# EAGLE board Platine v25 (EAGLE 9.7.0)
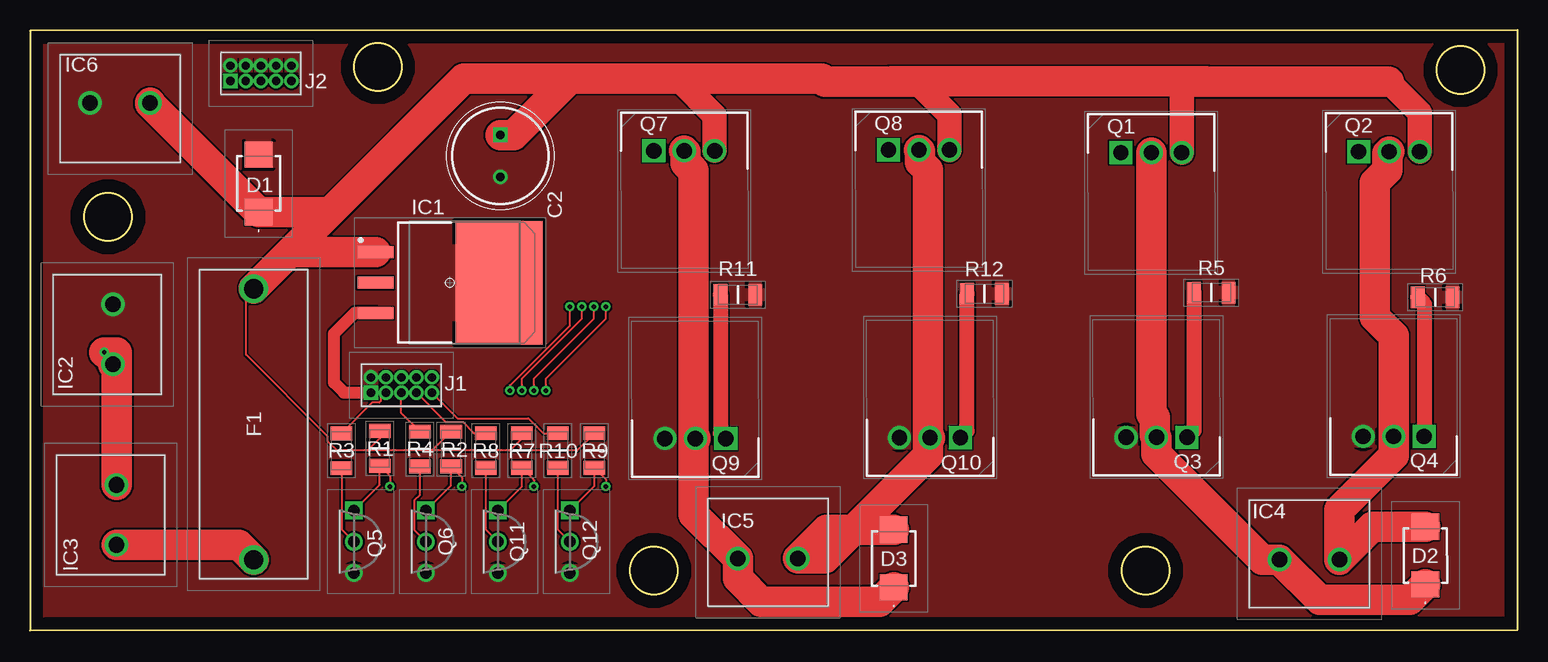
[diagram p0: board, top side]
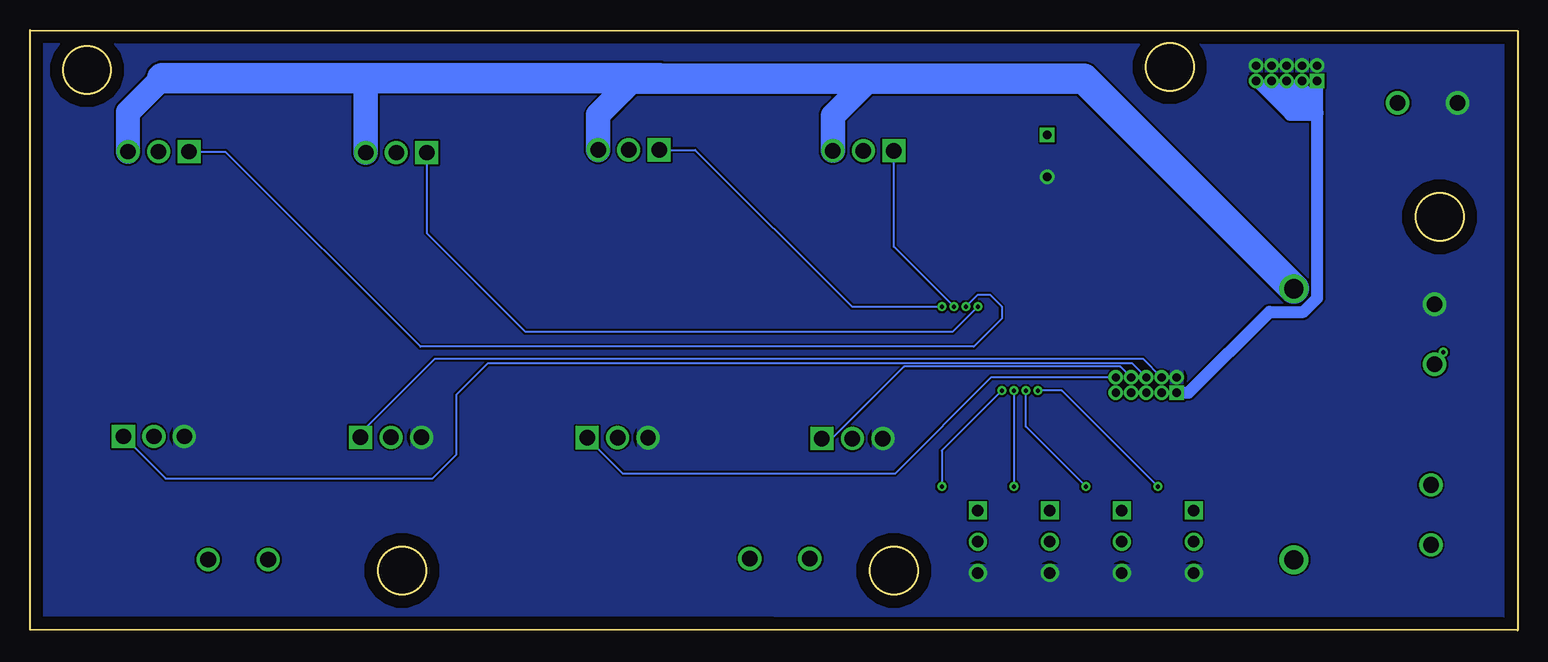
[diagram p1: board, bottom side, seen from below]

Size 124.01 x 50.08 mm. Coordinates in mm from the lower left corner, seen from the top.
Outline: 0,0 124.01,0.08 124.01,50.08 0,50 0,0
Outline: circle at 119.26,46.75 radius 2
Outline: circle at 29,47 radius 2
Outline: circle at 6.5,34.5 radius 2
Outline: circle at 52,5 radius 2
Outline: circle at 93,5 radius 2
Copper layers (1*16): Top / Bottom
Stack-up Default Layer Stack: Top User Defined 0.035mm / Dielectric-1 User Defined 1.5mm / Bottom User Defined 0.035mm
Design rules "default": minimum track width 6mil, minimum drill 0.35mm, track to track 6mil, track to pad 6mil, pad to pad 6mil, via to via 6mil, smd to smd 6mil, copper to edge 40mil, drill to drill 6mil, minimum pad ring 10mil, minimum via ring 8mil, stop-mask expansion 4mil, vias tented up to drill 0mil, thermal gap 10mil
Net classes: 1 Leistung: width 2.032 mm; 2 Steuerung: width 0.152 mm

## Footprints (pad centres in the part's own frame; a part is rotated, then mirrored left to right if it is on the bottom)
CAPPRD350W52D800H1300 = drill 0.7 pad 1.1 square: 1 0,0 | drill 0.7 pad 1.1: 2 3.5,0
10BJ15CA = smd 2.2 x 2.3: 1 -2.4,0; 2 2.4,0
64600001223 = drill 1.6 pad 2.4: 1 0,0; 2 22.6,0
TO254P1420X457-4N = smd 3 x 1: 1 -6.2,2.54; 2 -6.2,0; 3 -6.2,-2.54 | smd 7.25 x 10.3: 4 4.1,0
TB00150002BE = drill 1.3 pad 1.95: 1 0,0; 2 5,0
M503500542 = drill 0.7 pad 1.1 square: 1 0,0 | drill 0.7 pad 1.1: 2 0,1.27; 3 1.27,0; 4 1.27,1.27; 5 2.54,0; 6 2.54,1.27; 7 3.81,0; 8 3.81,1.27; 9 5.08,0; 10 5.08,1.27
TO254P469X1042X1967-3P = drill 1.28 pad 1.92 square: 1 0,0 | drill 1.28 pad 1.92: 2 2.54,0; 3 5.08,0
KA431AZTA = drill 0.96 pad 1.493 square: 1 0,0 | drill 0.96 pad 1.493: 2 2.6,0; 3 5.2,0
RESC3216X74N = smd 1.15 x 1.8: 1 -1.45,0; 2 1.45,0

## Placement (x,y rotation side)
C2  860020474014  [CAPPRD350W52D800H1300]  39.21,41.32 270 top
D1  10BJ15CA  [10BJ15CA]  19.06,37.28 90 top
D2  10BJ15CA  [10BJ15CA]  116.32,6.25 90 top
D3  10BJ15CA  [10BJ15CA]  72,6 90 top
F1  64600001223  [64600001223]  18.65,5.9 90 top
IC1  MC7805ACD2TR4G  [TO254P1420X457-4N]  35,29 0 top
IC2  TB001-500-02BE  [TB00150002BE]  6.92,22.2 90 top
IC3  TB001-500-02BE  [TB00150002BE]  7.22,7.14 90 top
IC4  TB001-500-02BE  [TB00150002BE]  104.16,5.91 0 top
IC5  TB001-500-02BE  [TB00150002BE]  59,6 0 top
IC6  TB001-500-02BE  [TB00150002BE]  10,44 180 top
J1  M50-3500542  [M503500542]  28.41,19.83 0 top
J2  M50-3500542  [M503500542]  16.71,45.83 0 top
Q1  IRF5210PBF  [TO254P469X1042X1967-3P]  90.93,39.85 0 top
Q2  IRF5210PBF  [TO254P469X1042X1967-3P]  110.76,39.93 0 top
Q3  IRLZ44NPBF  [TO254P469X1042X1967-3P]  96.45,16.11 180 top
Q4  IRLZ44NPBF  [TO254P469X1042X1967-3P]  116.22,16.19 180 top
Q5  BC550CTA  [KA431AZTA]  27,10 270 top
Q6  BC550CTA  [KA431AZTA]  33,10 270 top
Q7  IRF5210PBF  [TO254P469X1042X1967-3P]  52,40 0 top
Q8  IRF5210PBF  [TO254P469X1042X1967-3P]  71.56,40.08 0 top
Q9  IRLZ44NPBF  [TO254P469X1042X1967-3P]  58,16 180 top
Q10  IRLZ44NPBF  [TO254P469X1042X1967-3P]  77.56,16.08 180 top
Q11  BC550CTA  [KA431AZTA]  39,10 270 top
Q12  BC550CTA  [KA431AZTA]  45,10 270 top
R1  CRMA1206AF10K0DKEF  [RESC3216X74N]  29.15,15.18 270 top
R2  CRMA1206AF10K0DKEF  [RESC3216X74N]  35.1,15.13 270 top
R3  CRMA1206AF10K0DKEF  [RESC3216X74N]  25.96,14.99 270 top
R4  CRMA1206AF10K0DKEF  [RESC3216X74N]  32.5,15.13 270 top
R5  CRMA1206AF10K0DKEF  [RESC3216X74N]  98.47,28.17 0 top
R6  CRMA1206AF10K0DKEF  [RESC3216X74N]  117.13,27.79 0 top
R7  CRMA1206AF10K0DKEF  [RESC3216X74N]  41,15 270 top
R8  CRMA1206AF10K0DKEF  [RESC3216X74N]  38,15 270 top
R9  CRMA1206AF10K0DKEF  [RESC3216X74N]  47.05,15 270 top
R10  CRMA1206AF10K0DKEF  [RESC3216X74N]  44,15 270 top
R11  CRMA1206AF10K0DKEF  [RESC3216X74N]  59,28 0 top
R12  CRMA1206AF10K0DKEF  [RESC3216X74N]  79.56,28.08 0 top

## Library data of the parts
C2 = SamacSys_Parts; DESCRIPTION: Wurth Elektronik 470uF 25 V dc Aluminium Electrolytic Capacitor, WCAP-ATG5 Series 2000h 8 (Dia.) x 11.5mm; HEIGHT: 13mm; MANUFACTURER_NAME: Wurth Elektronik; MANUFACTURER_PART_NUMBER: 860020474014; MOUSER_PART_NUMBER: 710-860020474014; MOUSER_PRICE-STOCK: https://www.mouser.co.uk/ProductDetail/Wurth-Elektronik/860020474014?qs=0KOYDY2FL2%252BfCDf5E%252Bq6Tw%3D%3D
D1-D3 = SamacSys_Parts; DESCRIPTION: 24.4V Clamp 41A Ipp Tvs Diode Surface Mount SMB; HEIGHT: 2.4mm; MANUFACTURER_NAME: Eaton; MANUFACTURER_PART_NUMBER: 10BJ15CA
F1 = SamacSys_Parts; DESCRIPTION: LITTELFUSE - 64600001223 - FUSE BLOCK, 5X20MM, THROUGH HOLE; HEIGHT: 12mm; MANUFACTURER_NAME: LITTELFUSE; MANUFACTURER_PART_NUMBER: 64600001223; MOUSER_PART_NUMBER: 576-64600001223; MOUSER_PRICE-STOCK: https://www.mouser.co.uk/ProductDetail/Littelfuse/64600001223?qs=up76HT6PtJjfTS5uVso6wg%3D%3D
IC1 = Custom Libary; HEIGHT: 4.572mm; MANUFACTURER_NAME: onsemi; MANUFACTURER_PART_NUMBER: MC7805ACD2TR4G; MOUSER_PART_NUMBER: 863-MC7805ACD2TR4G; MOUSER_PRICE-STOCK: https://www.mouser.co.uk/ProductDetail/onsemi/MC7805ACD2TR4G?qs=%252B9%2Fcbd0IE0T86FFku%252BN0%2FA%3D%3D
IC2-IC6 = SamacSys_Parts; DESCRIPTION: Fixed Terminal Blocks screw type, 5.00, horizontal, 2 poles, CUI Blue, slotted screw, PCB mount; HEIGHT: 12.9mm; MANUFACTURER_NAME: CUI Inc.; MANUFACTURER_PART_NUMBER: TB001-500-02BE; MOUSER_PART_NUMBER: 490-TB001-500-02BE; MOUSER_PRICE-STOCK: https://www.mouser.co.uk/ProductDetail/CUI-Devices/TB001-500-02BE?qs=vLWxofP3U2zBBnHgU5u3DA%3D%3D
J1 J2 = SamacSys_Parts; DESCRIPTION: Header 2x5way DIL VERT Pin HARWIN M50-35 Series, 1.27mm Pitch 10 Way 2 Row Straight PCB Header, Solder Termination, 1A; HEIGHT: 4.15mm; MANUFACTURER_NAME: Harwin; MANUFACTURER_PART_NUMBER: M50-3500542; MOUSER_PART_NUMBER: 855-M50-3500542; MOUSER_PRICE-STOCK: https://www.mouser.co.uk/ProductDetail/Harwin/M50-3500542?qs=9fQaSFfsqsyXI0P9tFOVoQ%3D%3D
Q1 Q2 Q7 Q8 = Custom Libary; DESCRIPTION: MOSFET P-Channel 100V 40A TO220AB Infineon IRF5210PBF P-channel MOSFET Transistor, 40 A, 100 V, 3-Pin TO-220AB; HEIGHT: 4.69mm; MANUFACTURER_NAME: Infineon; MANUFACTURER_PART_NUMBER: IRF5210PBF; MOUSER_PART_NUMBER: 942-IRF5210PBF; MOUSER_PRICE-STOCK: https://www.mouser.co.uk/ProductDetail/Infineon-IR/IRF5210PBF?qs=9%252BKlkBgLFf3S3YiL4ijtLg%3D%3D
Q3 Q4 Q9 Q10 = Custom Libary; DESCRIPTION: N-channel MOSFET,IRLZ44N 47A 55V; HEIGHT: 4.69mm; MANUFACTURER_NAME: Infineon; MANUFACTURER_PART_NUMBER: IRLZ44NPBF; MOUSER_PART_NUMBER: 942-IRLZ44NPBF; MOUSER_PRICE-STOCK: https://www.mouser.co.uk/ProductDetail/Infineon-IR/IRLZ44NPBF?qs=9%252BKlkBgLFf15OZZk%252BD0ibg%3D%3D
Q5 Q6 Q11 Q12 = SamacSys_Parts; DESCRIPTION: Bipolar Transistors - BJT NPN 45V 100mA HFE/800; HEIGHT: 5.33mm; MANUFACTURER_NAME: onsemi; MANUFACTURER_PART_NUMBER: BC550CTA; MOUSER_PART_NUMBER: 512-BC550CTA; MOUSER_PRICE-STOCK: https://www.mouser.co.uk/ProductDetail/ON-Semiconductor-Fairchild/BC550CTA/?qs=ljbEvF4DwOM46%2Fg9NzWlqQ%3D%3D
R1-R12 = SamacSys_Parts; DESCRIPTION: Thick Film Resistors - SMD 0.30W 10Kohm .5% AEC-Q200; HEIGHT: 0.74mm; MANUFACTURER_NAME: Vishay; MANUFACTURER_PART_NUMBER: CRMA1206AF10K0DKEF; MOUSER_PART_NUMBER: 71-CRMA1206AF10K0DKF; MOUSER_PRICE-STOCK: https://www.mouser.co.uk/ProductDetail/Vishay/CRMA1206AF10K0DKEF?qs=QNEnbhJQKvbmEa6uzWLn8A%3D%3D

## Nets
D1 [Steuerung]: J1.3 R3.1
D2 [Steuerung]: J1.5 R4.1
D3 [Steuerung]: J1.4 Q3.1 R5.1
D4 [Steuerung]: J1.6 Q4.1 R6.1
D5 [Steuerung]: J1.7 R8.1
D6 [Steuerung]: J1.9 R10.1
D7 [Steuerung]: J1.8 Q9.1 R11.1
D8 [Steuerung]: J1.10 Q10.1 R12.1
GND: C2.2 D1.2 IC1.4 IC2.2 IC6.2 J1.2 J2.2 J2.4 J2.6 J2.8 J2.10 Q3.3 Q4.3 Q5.3 Q6.3 Q9.3 Q10.3 Q11.3 Q12.3 R5.2 R6.2 R11.2 R12.2
GND_NOPAD: IC1.2
N$1: F1.1 IC3.1
N$2: Q1.1 Q5.1 R1.2
N$3 [Steuerung]: Q5.2 R3.2
N$4: Q2.1 Q6.1 R2.2
N$5 [Steuerung]: Q6.2 R4.2
N$6: D2.2 IC4.2 Q2.2 Q4.2
N$7: D2.1 IC4.1 Q1.2 Q3.2
N$8: Q7.1 Q11.1 R7.2
N$9 [Steuerung]: Q11.2 R8.2
N$10: Q8.1 Q12.1 R9.2
N$11 [Steuerung]: Q12.2 R10.2
N$12: D3.2 IC5.2 Q8.2 Q10.2
N$13: D3.1 IC5.1 Q7.2 Q9.2
VIN [Leistung]: IC2.1 IC3.2
VIN_S: C2.1 D1.1 F1.2 IC1.1 IC6.1 Q1.3 Q2.3 Q7.3 Q8.3 R1.1 R2.1 R7.1 R9.1
VS5 [Steuerung]: IC1.3 J1.1 J2.1 J2.3 J2.5 J2.7 J2.9

## Tracks (layer width: path | path; a pad name or v marks a point on that pad's centre or on a via)
D1
  Top 0.152: R3.1 28.52,19 29.11,19 29.24,19.13 29.24,19.39 J1.3
D2
  Top 0.152: R4.1 30.95,18.13 J1.5
D3
  Top 1.27: R5.1 97.03,16.68 Q3.1
  Bottom 0.152: J1.4 31.25,22.67 90.25,22.67 96.45,16.46 Q3.1
D4
  Top 1.27: R6.1 116.26,27.21 116.26,16.23 Q4.1
  Bottom 0.152: Q4.1 112.7,12.67 90.47,12.67 88.47,14.67 88.47,19.67 85.83,22.3 32.16,22.3 J1.6
D5
  Top 0.152: J1.7 34.67,17.38 36.1,17.38 37.03,16.45 R8.1
D6
  Top 0.152: J1.9 35.63,17.69 41.56,17.69 42.8,16.45 R10.1
D7
  Top 1.27: R11.1 57.55,16.45 Q9.1
  Bottom 0.152: J1.8 33.12,22 51.14,22 57.14,16 Q9.1
D8
  Top 1.27: R12.1 78.11,16.63 Q10.1
  Bottom 0.152: J1.10 43.9,21.1 51.92,13.08 74.56,13.08 Q10.1
GND
  pour Top: 0,49.89 0,0.08 123.01,0.08 123.01,51.14
  pour Bottom: 0,49.89 0,0.08 124.84,0.08 124.84,51.16
N$1
  Top 2.54: IC3.1 17.41,7.14 F1.1
N$2  (via drill 0.35)
  Top 0.152: Q5.1 29.15,12.15 R1.2 30,12.88 v30,12 | v40,20 40,20.43 45,25.43 v45,27
  Bottom 0.152: v30,12 38,20 v40,20 | v45,27 47.08,24.92 82.72,24.92 90.94,33.14 Q1.1
N$3
  Top 0.152: R3.2 26.02,13.47 26.02,8.38 Q5.2
N$4  (via drill 0.35)
  Top 0.152: Q6.1 35.1,12.1 R2.2 36,12.78 v36,12 | v41,20 41,21 46,26 v46,27
  Bottom 0.152: v36,12 41,17 v41,20 | v46,27 45,28 44,28 43,27 43,26 45.33,23.67 91.47,23.67 107.72,39.93 Q2.1
N$5
  Top 0.152: R4.2 32.5,11.32 32.02,10.84 32.02,8.38 Q6.2
N$6
  Top 2.54: D2.2 111.9,8.65 IC4.2 109.16,10.07 113.68,14.6 Q4.2 113.68,24.55 112.09,26.14 112.09,37.33 113.14,38.38 113.14,39.77 Q2.2
N$7
  Top 2.54: Q1.2 93.47,18.07 93.76,17.78 93.76,16.27 Q3.2 93.92,14.72 102.73,5.91 IC4.1 107.51,2.55 115.02,2.55 D2.1
N$8  (via drill 0.35)
  Top 0.152: Q11.1 41,12 R7.2 42,12.55 v42,12 | v42,20 42,21 47,26 v47,27
  Bottom 0.152: v42,20 v42,12 | v47,27 52,32 Q7.1
N$9
  Top 0.152: R8.2 38,8.4 Q11.2
N$10  (via drill 0.35)
  Top 0.152: Q12.1 47.05,12.05 R9.2 48,12.61 v48,12 | v43,20 43,21 48,26 v48,27
  Bottom 0.152: v43,20 48,15 v48,12 | v48,27 55.49,27 68.56,40.08 Q8.1
N$11
  Top 0.152: R10.2 44,8.4 Q12.2
N$12
  Top 2.54: 74.86,16.23 Q10.2 74.86,15.92 | 74.86,15.92 74.86,16.23 | D3.2 66.4,8.4 IC5.2 66.28,6 74.86,14.58 74.86,15.92 | Q8.2 74.2,39.98 74.2,39.07 74.86,38.41 74.86,16.23
N$13
  Top 2.54: 55.3,16.16 Q9.2 | 55.3,16.16 55.3,9.7 IC5.1 59,4.36 60.95,2.41 70.81,2.41 D3.1 | Q7.2 54.64,39.9 54.64,38.99 55.3,38.33 55.3,16.16
VIN  (via drill 0.35)
  Top 2.54: IC2.1 6.92,23.2 v6.2,23.2 7.2,23.2 7.22,23.18 IC3.2
VIN_S
  Top 0.152: R9.1 45.6,15 40,15 | R7.1 41,16 40,15 | 40,15 33.52,15 | R2.1 33.52,15 | R1.1 29.15,16 28.15,15 | 33.52,15 28.15,15 | 28.15,15 25.6,15 24.83,15.77 24.83,16.17 18,23 18,27.85 F1.2
  Top 2.032: Q2.3 115.84,43.17 113.26,45.75 | Q1.3 96.02,45.75 | 98.02,45.8 98.02,45.75 | Q8.3 76.64,43 73.89,45.75 | 71.89,45.75 71.84,45.8 | 66.25,45.75 66,46 | Q7.3 57.08,42.92 54,46
  Top 2.54: 45,46 36.15,46 25.03,34.88 | 45,46 54,46 66,46 | 66.25,45.75 71.89,45.75 73.89,45.75 | 71.84,45.8 98.02,45.8 | 96.02,45.75 98.02,45.75 113.26,45.75 | F1.2 21.69,31.54 | 21.69,31.54 25.03,34.88 | IC1.1 21.69,31.54 | 25.03,34.88 D1.1 10,43.94 IC6.1 | C2.1 40.32,41.32 45,46
  Bottom 2: Q2.3 115.84,43.24
  Bottom 2.032: 115.84,43.24 113,46.08 | Q1.3 96.02,46.08 | Q8.3 76.64,43 73.64,46 | 71.64,46 71.56,46.08 | Q7.3 57.08,42.92 54,46
  Bottom 2.54: 113,46.08 96.02,46.08 71.56,46.08 | 73.64,46 71.64,46 54,46 36.15,46 F1.2
VS5
  Top 1.016: IC1.3 28.75,26.51 27.1,26.51 25.34,24.75 25.34,20.66 26.17,19.83 J1.1
  Bottom 1.016: 16.71,43 16.71,27.71 17.85,26.57 20.7,26.57 27.43,19.84 J1.1 | 16.71,43.29 16.71,44 | 16.71,44 J2.1 | J2.3 17.98,45.27 16.71,44 | J2.5 16.71,43.29 | 16.71,43.29 16.71,43 | J2.7 17.69,43 | 17.69,43 16.71,43 | J2.9 18.96,43 17.69,43